# EAGLE board SparkFun LoRaSerial 915MHz - 1W (EAGLE 9.6.2)
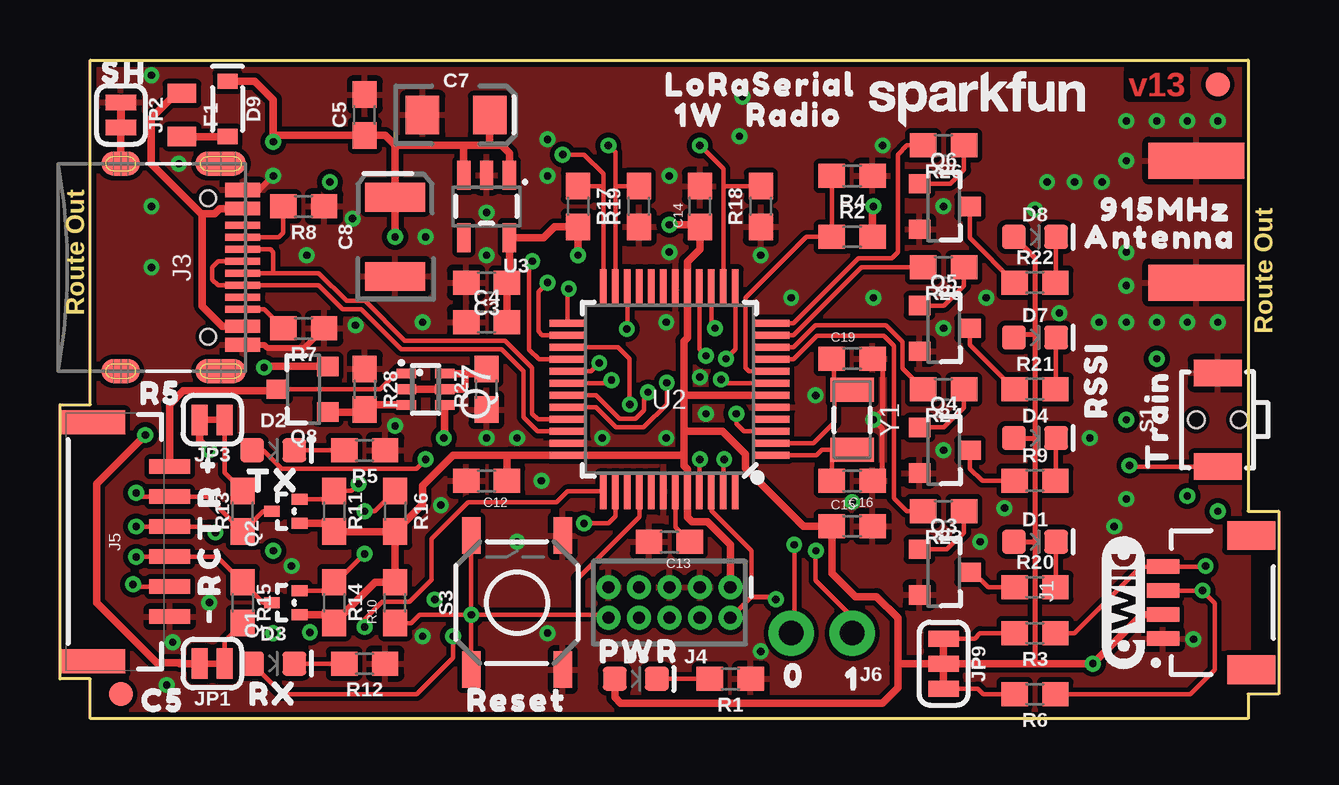
[diagram p0: board, top side]
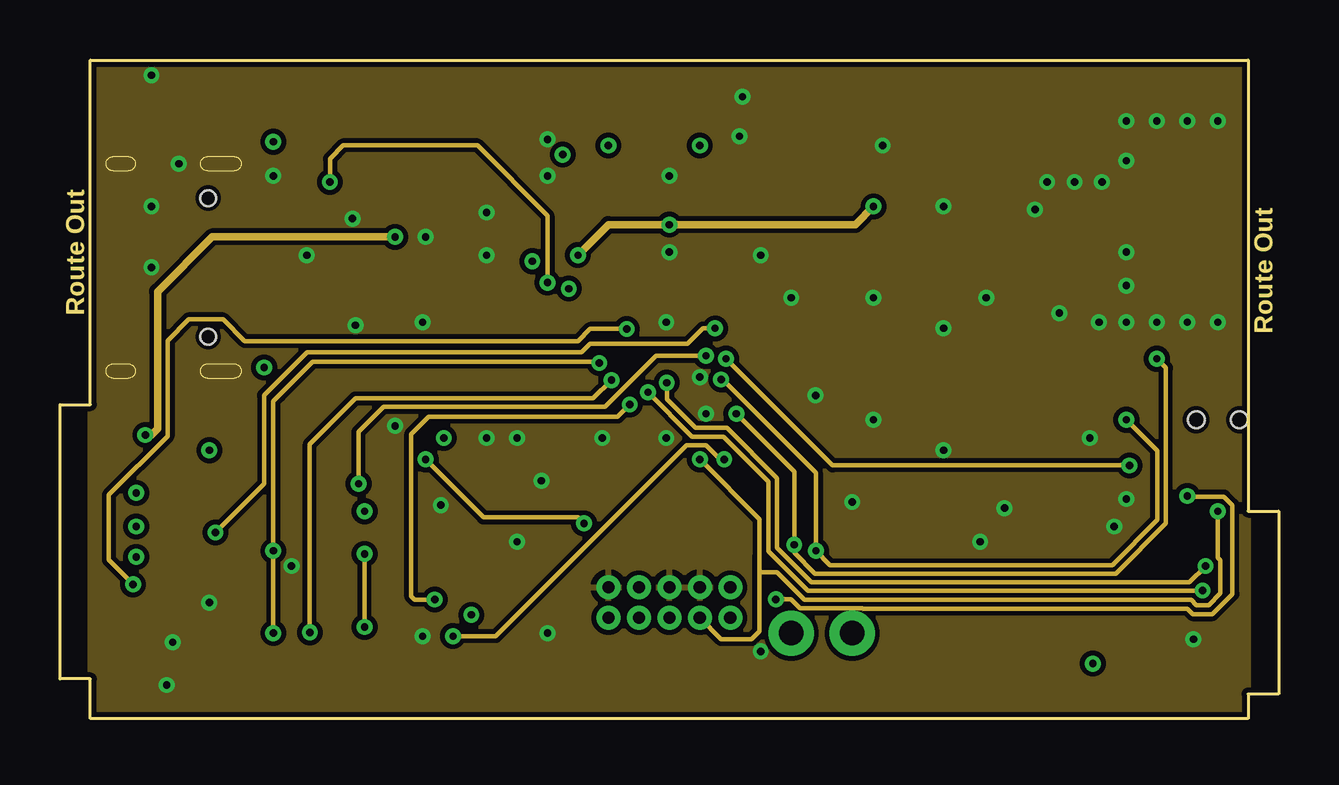
[diagram p1: board, inner layer Digital]
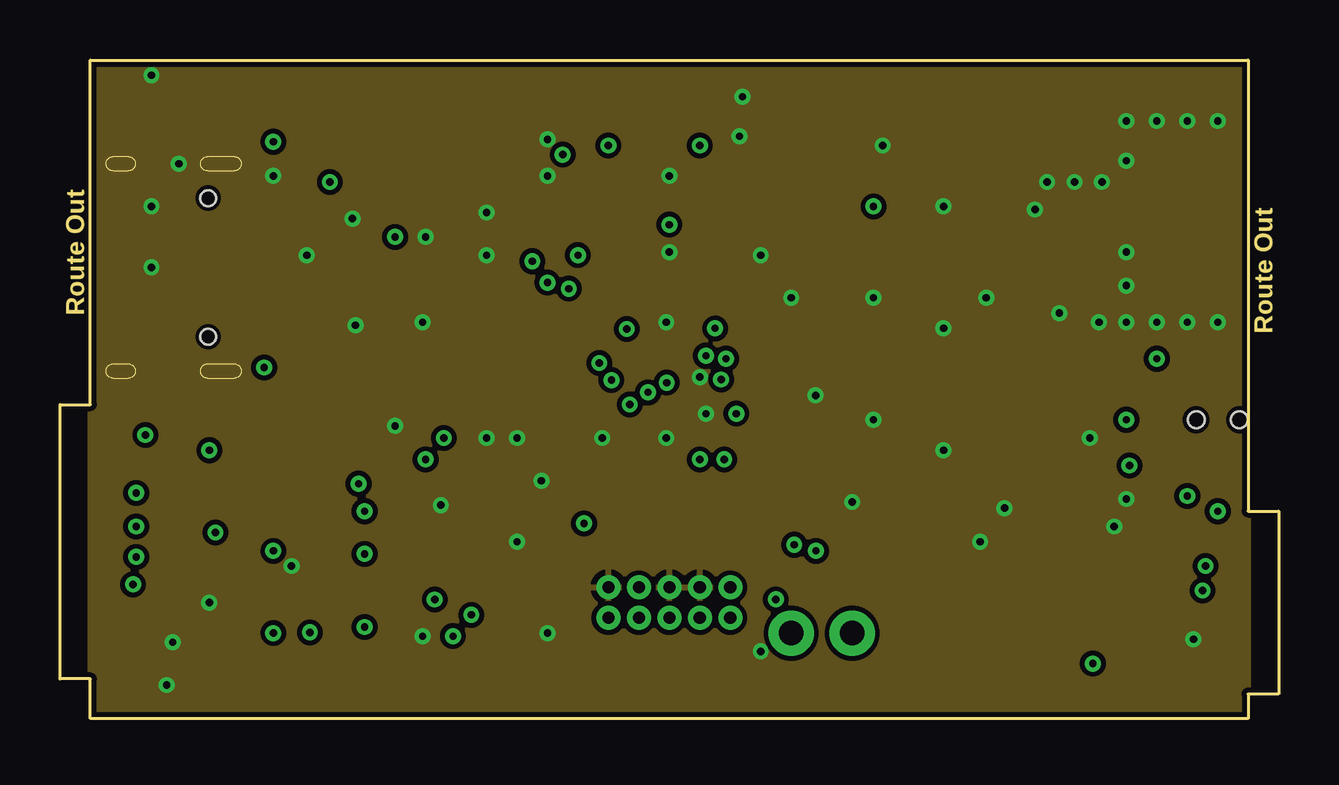
[diagram p2: board, inner layer GND]
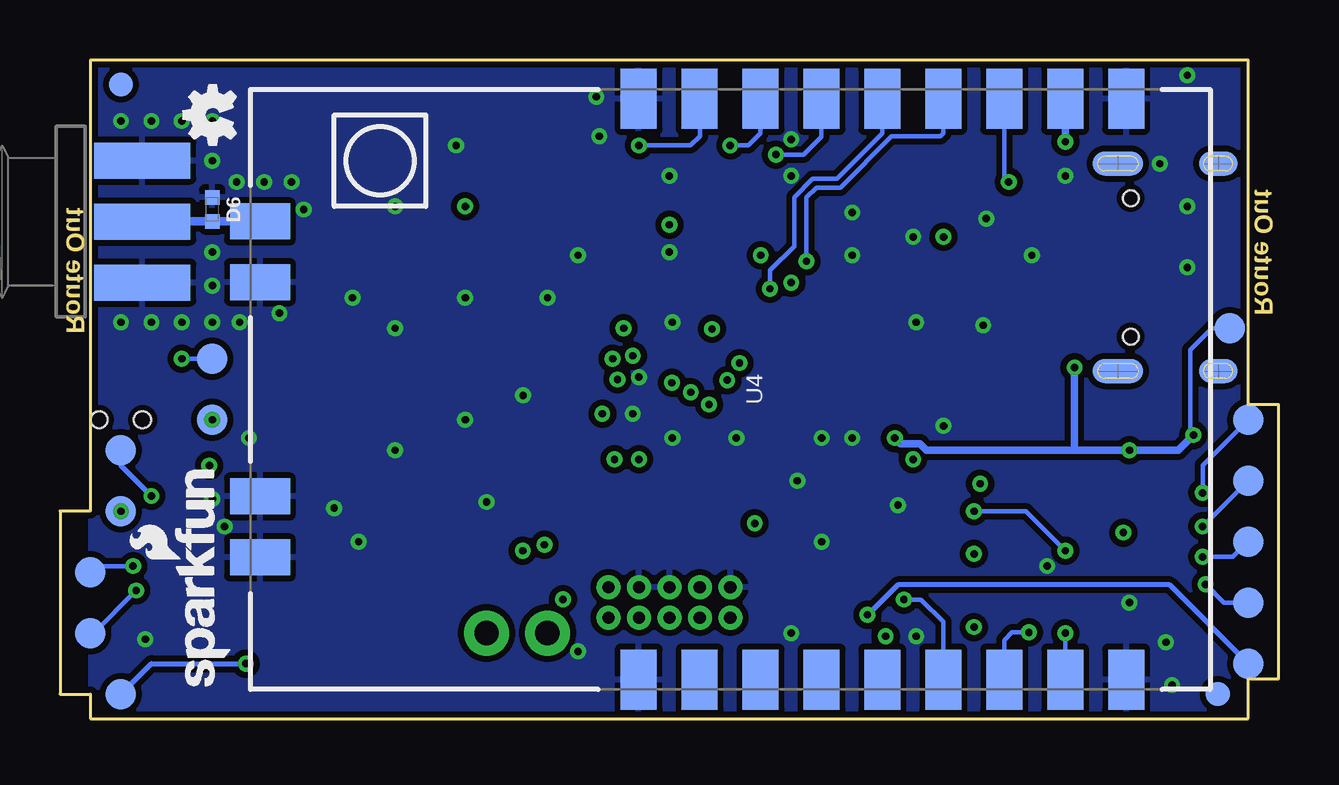
[diagram p3: board, bottom side, seen from below]

Size 50.8 x 27.44 mm. Coordinates in mm from the lower left corner, seen from the top.
Outline: 1.27,0 1.27,1.66 0,1.66 0,13.09 1.27,13.09 1.27,27.44 49.53,27.44 49.53,8.64 50.8,8.64 50.8,1.02 49.53,1.02 49.53,0 1.27,0
Copper layers (1+2*15+16): Top 0.035559375mm / dielectric 0.47751875mm / Digital 0.035559375mm / dielectric 0.47751875mm / GND 0.035559375mm / dielectric 0.47751875mm / Bottom 0.035559375mm
Design rules "SparkFun-4-Layer-General-JLCPCB": minimum track width 7mil, minimum drill 12mil, track to track 7mil, track to pad 7mil, pad to pad 7mil, via to via 7mil, smd to smd 7mil, copper to edge 7mil, drill to drill 7mil, minimum pad ring 7mil, minimum via ring 7mil, stop-mask expansion 3mil, vias tented up to drill 25mil, thermal gap 10mil

## Footprints (pad centres in the part's own frame; a part is rotated, then mirrored left to right if it is on the bottom)
0603 = smd 1.1 x 1: 1 -0.85,0; 2 0.85,0
EIA3216 = smd 1.4 x 1.6: + 1.4,0; - -1.4,0
EIA3528 = smd 1.2 x 2.5: A 1.65,0; C -1.65,0
LED-0603 = smd 1 x 1: A -0.877,0; C 0.877,0
0402-TIGHT = smd 0.6 x 0.6: 1 -0.5,0; 2 0.5,0
SOD-323 = smd 0.63 x 0.83: A 1.15,0; C -1.15,0
RP-SMA-EDGE = smd 1.5 x 4: GND@0 -2.54,0; GND@1 2.54,0; SIG 0,0 | smd 1.5 x 4 bottom: GND@2 -2.54,0; GND@3 2.54,0
0805 = smd 0.8 x 1.2: 1 -0.9,0; 2 0.9,0
FIDUCIAL-1X2 = smd 1 x 1: 1 0,0
JST04_1MM_RA = smd 0.6 x 1.35: 1 -1.5,0; 2 -0.5,0; 3 0.5,0; 4 1.5,0 | smd 1.2 x 2: NC1 2.8,-3.675; NC2 -2.8,-3.675
USB-C-16P = smd 0.3 x 1.45: A5 -1.25,0; A6 -0.25,0; A7 0.25,0; A8 1.25,0; B5 1.75,0; B6 0.75,0; B7 -0.75,0; B8 -1.75,0 | smd 0.6 x 1.45: GND -3.225,0; GND2 3.225,0 | smd 1 x 2.1: SHLD1 -4.32,-0.915; SHLD2 4.32,-0.915 | smd 1 x 2.1 bottom: SHLD3 -4.32,-0.915; SHLD4 4.32,-0.915 | smd 1 x 1.6: SHLD5 -4.32,-5.095; SHLD8 4.32,-5.095 | smd 1 x 1.6 bottom: SHLD6 -4.32,-5.095; SHLD7 4.32,-5.095 | smd 0.55 x 1.45: VBUS1 -2.45,0; VBUS2 2.45,0 | hole 0.65: -2.89,-1.445; 2.89,-1.445
2X5-PTH-1.27MM-NO_SILK = drill 0.508 pad 1: 1 -2.54,-0.635; 2 -2.54,0.635; 3 -1.27,-0.635; 4 -1.27,0.635; 5 0,-0.635; 6 0,0.635; 7 1.27,-0.635; 8 1.27,0.635; 9 2.54,-0.635; 10 2.54,0.635
JST-6-SMD-1.25MM-LOCKING = smd 0.6 x 1.7: 1 -3.125,3.3; 2 -1.875,3.3; 3 -0.625,3.3; 4 0.625,3.3; 5 1.875,3.3; 6 3.125,3.3 | smd 1 x 2.7: NC1 4.975,0.1; NC2 -4.975,0.1
1X02_NO_SILK = drill 1.016 pad 1.88: 1 0,0; 2 2.54,0
SMT-JUMPER_2_NC_TRACE_SILK = smd 0.66 x 1.27: 1 -0.521,0; 2 0.521,0
SMT-JUMPER_3_2-NC_TRACE_SILK = smd 0.66 x 1.27: 1 -1.041,0; 2 0,0; 3 1.041,0
SOT-416FL = smd 0.46 x 0.65: 1 -0.5,-1.1; 2 0.5,-1.1; 3 0,0.05
SOT23-3 = smd 0.8 x 0.9: 1 -0.95,-1; 2 0.95,-1; 3 0,1.1
SOT363_PHILIPS = smd 0.4 x 0.8: 1 -0.65,-0.8; 2 0,-0.8; 3 0.65,-0.8; 4 0.65,0.8; 5 0,0.8; 6 -0.65,0.8
TACTILE_SWITCH_SMD_RIGHT_ANGLE = smd 1.1 x 2: 1 -1.95,0; 2 1.95,0 | hole 0.7: 0,0.9; 0,-0.9
TACTILE_SWITCH_SMD_5.2MM = smd 1.524 x 0.762: 1 -2.794,1.905; 2 2.794,1.905; 3 -2.794,-1.905; 4 2.794,-1.905
PAD.03X.05 = smd 1.27 x 1.27: 1 0,0
TQFP-48 = smd 1.5 x 0.28: 1 -4.25,2.75; 2 -4.25,2.25; 3 -4.25,1.75; 4 -4.25,1.25; 5 -4.25,0.75; 6 -4.25,0.25; 7 -4.25,-0.25; 8 -4.25,-0.75; 9 -4.25,-1.25; 10 -4.25,-1.75; 11 -4.25,-2.25; 12 -4.25,-2.75; 25 4.25,-2.75; 26 4.25,-2.25; 27 4.25,-1.75; 28 4.25,-1.25; 29 4.25,-0.75; 30 4.25,-0.25; 31 4.25,0.25; 32 4.25,0.75; 33 4.25,1.25; 34 4.25,1.75; 35 4.25,2.25; 36 4.25,2.75 | smd 0.28 x 1.5: 13 -2.75,-4.25; 14 -2.25,-4.25; 15 -1.75,-4.25; 16 -1.25,-4.25; 17 -0.75,-4.25; 18 -0.25,-4.25; 19 0.25,-4.25; 20 0.75,-4.25; 21 1.25,-4.25; 22 1.75,-4.25; 23 2.25,-4.25; 24 2.75,-4.25; 37 2.75,4.25; 38 2.25,4.25; 39 1.75,4.25; 40 1.25,4.25; 41 0.75,4.25; 42 0.25,4.25; 43 -0.25,4.25; 44 -0.75,4.25; 45 -1.25,4.25; 46 -1.75,4.25; 47 -2.25,4.25; 48 -2.75,4.25
SOT23-5 = smd 0.55 x 1.2: 1 -0.95,-1.3; 2 0,-1.3; 3 0.95,-1.3; 4 0.95,1.3; 5 -0.95,1.3
E19-915M30S = smd 2.5 x 1.5: 1 12.1,-3.82; 2 12.1,-1.28; 3 12.1,1.26; 4 12.1,3.8; 5 12.1,6.34; 6 12.1,8.88; 7 12.1,11.42; 8 12.1,13.96; 9 12.1,16.5; 10 -12.1,16.5; 11 -12.1,13.96; 12 -12.1,11.42; 13 -12.1,8.88; 14 -12.1,6.34; 15 -12.1,3.8; 16 -12.1,1.26; 17 -12.1,-1.28; 18 -12.1,-3.82 | smd 1.5 x 2.5: 19 -7,-19.6; 20 -4.46,-19.6; 21 4.46,-19.6; 22 7,-19.6
CRYSTAL-SMD-3.2X1.5MM = smd 1 x 1.8: P$1 -1.25,0; P$2 1.25,0

## Placement (x,y rotation side)
C3  1.0uF  [0603]  17.78,18.16 180 top
C4  0.1uF  [0603]  17.78,16.51 0 top
C5  1.0uF  [0603]  12.7,25.15 90 top
C7  10uF  [EIA3216]  16.51,25.15 0 top
C8  47uF  [EIA3528]  13.97,20.07 90 top
C12  0.1uF  [0603]  17.78,9.91 180 top
C13  0.1uF  [0603]  25.4,7.37 180 top
C14  0.1uF  [0603]  26.67,21.34 90 top
C15  0.1uF  [0603]  33.02,8.01 0 top
C16  15pF  [0603]  33.02,9.91 180 top
C19  15pF  [0603]  33.02,14.99 0 top
D1  GREEN  [LED-0603]  40.64,7.37 0 top
D2  BLUE  [LED-0603]  8.89,11.18 0 top
D3  Yellow  [LED-0603]  8.89,2.29 0 top
D4  GREEN  [LED-0603]  40.64,11.69 0 top
D5  RED  [LED-0603]  24,1.66 0 top
D6  PESD0402  [0402-TIGHT]  44.45,21.21 270 bottom
D7  GREEN  [LED-0603]  40.64,15.88 0 top
D8  GREEN  [LED-0603]  40.64,20.07 0 top
D9  3A/10V/280mV  [SOD-323]  6.99,25.4 270 top
E2  RP-SMA  [RP-SMA-EDGE]  47.37,20.7 90 bottom
F1  6V 0.5A  [0805]  5.08,25.15 270 top
FID1  FIDUCIAL1X2  [FIDUCIAL-1X2]  2.54,1.02 0 bottom
FID2  FIDUCIAL1X2  [FIDUCIAL-1X2]  48.26,26.42 0 bottom
FID3  FIDUCIAL1X2  [FIDUCIAL-1X2]  48.26,26.42 0 top
FID4  FIDUCIAL1X2  [FIDUCIAL-1X2]  2.54,1.02 0 top
FRAME3  FRAME-LEDGER  [CREATIVE_COMMONS]  91.44,-9.14 0 top  (outside the outline)
J1  QWIIC_RIGHT_ANGLE  [JST04_1MM_RA]  45.97,4.83 90 top
J3  USB C  [USB-C-16P]  7.62,18.8 270 top
J4  JTAG  [2X5-PTH-1.27MM-NO_SILK]  25.4,4.83 180 top
J5  [JST-6-SMD-1.25MM-LOCKING]  1.27,7.37 270 top
J6  [1X02_NO_SILK]  33.02,3.56 180 top
JP1  JUMPER-SMT_2_NC_TRACE_SILK  [SMT-JUMPER_2_NC_TRACE_SILK]  6.35,2.29 180 top
JP2  [SMT-JUMPER_2_NC_TRACE_SILK]  2.54,25.15 270 top
JP3  JUMPER-SMT_2_NC_TRACE_SILK  [SMT-JUMPER_2_NC_TRACE_SILK]  6.35,12.45 180 top
JP9  JUMPER-SMT_3_2-NC_TRACE_SILK  [SMT-JUMPER_3_2-NC_TRACE_SILK]  36.83,2.29 270 top
LOGO1  SPECIAL_INSTRUCTIONS-ORDERING  [ORDERING_INSTRUCTIONS]  73.66,50.55 0 top  (outside the outline)
LOGO2  SFE_LOGO_NAME_FLAME9_MM  [SFE_LOGO_NAME_FLAME_9MM]  44.96,5.85 90 bottom
LOGO3  QWIIC_LOGO_CONNECTOR  [QWIIC_5.5MM]  44.32,4.83 90 top
LOGO4  OSHW-LOGOMINI  [OSHW-LOGO-MINI]  44.45,25.15 90 bottom
LOGO5  SFE_LOGO_NAME9_MM  [SFE_LOGO_NAME_9MM]  38.23,25.91 0 top
Q1  20V/0.2A/8MHz/1.2Ω/1Vth  [SOT-416FL]  8.89,4.83 90 top
Q2  20V/0.2A/8MHz/1.2Ω/1Vth  [SOT-416FL]  8.89,8.64 90 top
Q3  600mA/40V  [SOT23-3]  36.83,6.1 270 top
Q4  600mA/40V  [SOT23-3]  36.83,11.18 270 top
Q5  600mA/40V  [SOT23-3]  36.83,16.26 270 top
Q6  600mA/40V  [SOT23-3]  36.83,21.34 270 top
Q7  [SOT363_PHILIPS]  15.24,13.72 270 top
Q8  20V/4.2A/52mΩ/1.4W  [SOT23-3]  10.16,13.72 90 top
R1  1k  [0603]  27.94,1.66 180 top
R2  10k  [0603]  33.02,20.07 0 top
R3  2.2k  [0603]  40.64,3.56 180 top
R4  10k  [0603]  33.02,22.61 180 top
R5  0  [0603]  12.7,11.18 180 top
R6  2.2k  [0603]  40.64,1.02 180 top
R7  5.1k  [0603]  10.16,16.26 180 top
R8  5.1k  [0603]  10.16,21.34 180 top
R9  22Ω  [0603]  40.64,9.91 0 top
R10  10k  [0603]  13.97,4.83 90 top
R11  2.2k  [0603]  11.43,8.64 270 top
R12  330  [0603]  12.7,2.29 180 top
R13  2.2k  [0603]  7.62,8.64 90 top
R14  2.2k  [0603]  11.43,4.83 270 top
R15  2.2k  [0603]  7.62,4.83 270 top
R16  100k  [0603]  13.97,8.64 270 top
R17  100k  [0603]  21.59,21.34 270 top
R18  100k  [0603]  29.21,21.34 90 top
R19  100k  [0603]  24.13,21.34 90 top
R20  22Ω  [0603]  40.64,5.46 0 top
R21  22Ω  [0603]  40.64,13.72 0 top
R22  22Ω  [0603]  40.64,18.16 0 top
R23  1k  [0603]  36.83,8.64 180 top
R24  1k  [0603]  36.83,13.72 180 top
R25  1k  [0603]  36.83,18.8 180 top
R26  1k  [0603]  36.83,23.88 180 top
R27  100k  [0603]  17.78,13.72 90 top
R28  1M  [0603]  12.7,13.72 270 top
S1  Train  [TACTILE_SWITCH_SMD_RIGHT_ANGLE]  48.26,12.45 90 top
S3  Reset  [TACTILE_SWITCH_SMD_5.2MM]  19.05,4.83 90 top
TP1  [PAD.03X.05]  48.26,1.02 0 bottom
TP2  [PAD.03X.05]  2.03,16.26 0 bottom
TP3  [PAD.03X.05]  48.26,11.18 0 bottom
TP4  [PAD.03X.05]  48.26,8.64 0 bottom
TP5  [PAD.03X.05]  1.27,2.29 0 bottom
TP6  [PAD.03X.05]  1.27,7.37 0 bottom
TP7  [PAD.03X.05]  1.27,12.45 0 bottom
TP8  [PAD.03X.05]  1.27,9.91 0 bottom
TP9  [PAD.03X.05]  1.27,4.83 0 bottom
TP10  [PAD.03X.05]  49.53,3.56 0 bottom
TP11  [PAD.03X.05]  49.53,6.1 0 bottom
TP12  [PAD.03X.05]  44.45,14.99 0 bottom
TP13  [PAD.03X.05]  44.45,12.45 0 bottom
U2  ATSAMD21G-A  [TQFP-48]  25.4,13.72 180 top
U3  3.3V/150mA  [SOT23-5]  17.78,21.34 180 top
U4  E19-915M30S  [E19-915M30S]  22.86,13.72 270 bottom
U$1  [1W1]  26.67,25.15 0 top
U$2  [RESET0]  19.05,0.77 0 top
U$3  [915MHZ0]  46.1,21.21 0 top
U$4  [TRAIN0]  45.72,12.45 90 top
U$5  [RADIO2]  30.61,25.15 0 top
U$6  [01]  30.61,1.78 0 top
U$7  [PWR0]  24.13,2.8 0 top
U$9  [ANTENNA1]  45.85,20.07 0 top
U$10  [RX1]  8.89,1.02 0 top
U$11  [TX0]  8.89,9.91 0 top
U$12  [#0]  6.22,10.54 0 top
U$13  [#1]  6.22,4.32 90 top
U$14  [R3]  6.22,5.59 90 top
U$15  [T2]  6.22,8.01 90 top
U$16  [C0]  6.22,6.74 90 top
U$17  [R1]  6.22,9.28 90 top
U$18  [LORASERIAL0]  29.21,26.42 0 top
U$19  [C50]  4.3,0.75 0 top
U$20  [R50]  4.2,13.55 0 top
U$21  [RSSI0]  43.18,14.1 90 top
U$22  [10]  33.02,1.66 0 top
U$23  [SH0]  2.67,26.93 0 top
Y1  32.768kHz  [CRYSTAL-SMD-3.2X1.5MM]  33.02,12.45 270 top

## Library data of the parts
C3 C5 = SparkFun-Capacitors; PROD_ID: CAP-13930
C4 = SparkFun-Capacitors; PROD_ID: CAP-08604
C7 = SparkFun-Capacitors; PROD_ID: CAP-00811
C8 = SparkFun-Capacitors; PROD_ID: CAP-08310
C12-C15 = SparkFun-Capacitors; PROD_ID: CAP-00810
C16 C19 = SparkFun-Capacitors; PROD_ID: CAP-07881
D1 D4 D7 D8 = SparkFun-LED; PROD_ID: DIO-00821
D2 = SparkFun-LED; PROD_ID: DIO-08575
D3 = SparkFun-LED; PROD_ID: DIO-09003
D5 = SparkFun-LED; PROD_ID: DIO-00819
D6 = SparkFun-DiscreteSemi; PROD_ID: DIO-15359
D9 = SparkFun-DiscreteSemi; PROD_ID: DIO-14072
E2 = SparkFun-RF; PROD_ID: CONN-00827
F1 = SparkFun-Fuses; PROD_ID: RES-13945
FID1-FID4 FRAME3 LOGO1-LOGO5 = SparkFun-Aesthetics
J1 = SparkFun-Connectors; PROD_ID: CONN-13694
J3 = USB-C
J4 J6 TP1-TP13 = SparkFun-Connectors
J5 = SparkFun-Connectors; PROD_ID: CONN-16497
JP1-JP3 JP9 = SparkFun-Jumpers
Q1 Q2 = SparkFun-DiscreteSemi; PROD_ID: TRANS-14399
Q3-Q6 = SparkFun-DiscreteSemi; PROD_ID: TRANS-08049
Q7 = SparkFun-DiscreteSemi; PROD_ID: TRANS-14386
Q8 = SparkFun-DiscreteSemi; PROD_ID: TRANS-14388
R1 R23-R26 = SparkFun-Resistors; PROD_ID: RES-07856
R2 R4 R10 = SparkFun-Resistors; PROD_ID: RES-00824
R3 R6 R11 R13-R15 = SparkFun-Resistors; PROD_ID: RES-08272
R5 = SparkFun-Resistors; PROD_ID: RES-08609
R7 R8 = SparkFun-Resistors; PROD_ID: RES-12083
R9 R20-R22 = SparkFun-Resistors; PROD_ID: RES-08698
R12 = SparkFun-Resistors; PROD_ID: RES-00818
R16-R19 R27 = SparkFun-Resistors; PROD_ID: RES-07828
R28 = SparkFun-Resistors; PROD_ID: RES-07868
S1 = SparkFun-Switches; PROD_ID: COMP-12265
S3 = SparkFun-Switches; PROD_ID: SWCH-14139
U2 = samd21-temp; PROD_ID: IC-13064
U3 = SparkFun-IC-Power; PROD_ID: VREG-00822
U4 = SparkFun-RF; PROD_ID: IC-14076
U$1-U$7 U$9-U$23 = output
Y1 = samd21-temp; PROD_ID: XTAL-13062

## Nets
3.3V [power]: C3.1 C4.2 C12.1 C14.1 C15.1 D1.A D4.A D5.A D7.A D8.A J1.2 J4.1 JP9.2 Q1.1 Q2.1 R2.2 R10.2 R11.2 R14.2 R16.2 R17.2 TP1.1 U2.6 U2.17 U2.36 U2.44 U3.5
5V: C5.1 C7.+ C8.A D9.C JP1.2 JP3.2 Q7.4 Q8.2 TP2.1 U3.1 U3.3 U4.11
A0: J6.2 TP12.1 U2.3
A1: J6.1 TP13.1 U2.7
A2/BOARD_ID: R2.1 R4.2 U2.8
A3/RSSI1: R23.2 U2.9
A4/RSSI2: R24.2 U2.10
A5/RX_LED: D3.A U2.47
CC1: J3.A5 R8.2
CC2: J3.B5 R7.2
CTS-I_HV: J5.4 Q1.3 R15.1 TP6.1
D2/LORA_TXEN: R19.2 U2.23 U4.16
D3/LORA_RXEN: R18.2 U2.14 U4.17
D4/TRAIN: S1.1 U2.13
D5/LORA_!CS!: R17.1 U2.24 U4.15
D6/LORA_!RST!: R16.1 U2.29 U4.8
D7/LORA_D0: U2.30 U4.7
D8/RSSI3: R25.2 U2.11
D9/RSSI4: R26.2 U2.12
D10/LORA_D1: U2.27 U4.6
D11/SPI_PICO: U2.25 U4.14
D12/SPI_POCI: U2.28 U4.13
D13/SPI_SCK: U2.26 U4.12
D20/SDA: J1.3 R6.1 TP10.1 U2.31
D21/SCL: J1.4 R3.1 TP11.1 U2.32
D22: U2.21
D23: U2.19
D24: U2.20
D27/USB_HOST_EN: U2.41
D28/USB_D-: J3.A7 J3.B7 U2.33
D29/USB_D+: J3.A6 J3.B6 U2.34
D30/CTS-I_LV: Q1.2 R14.1 U2.37
D31/TX_LED: D2.A U2.38
D38/RTS-O: J5.5 TP9.1 U2.22
D42/AREF: U2.4
GND: C3.2 C4.1 C5.2 C7.- C8.C C12.2 C13.2 C14.2 C15.2 C16.1 C19.2 D6.1 E2.GND@0 E2.GND@1 E2.GND@2 E2.GND@3 J1.1 J3.GND J3.GND2 J4.3 J4.5 J4.9 J5.6 JP2.1 Q3.2 Q4.2 Q5.2 Q6.2 R1.1 R4.1 R5.1 R7.1 R8.1 R12.1 R18.1 R19.1 R27.1 R28.1 S1.2 S3.3 S3.4 U2.5 U2.18 U2.35 U2.42 U3.2 U4.1 U4.9 U4.10 U4.18 U4.20 U4.21 U4.22
LORA_ANT: D6.2 E2.SIG U4.19
N$1: C19.1 U2.2 Y1.P$1
N$2: C16.2 U2.1 Y1.P$2
N$3: D3.C R12.2
N$4: D2.C R5.2
N$5: JP3.1 R13.2
N$6: JP1.1 R15.2
N$7: D5.C R1.2
N$8: D4.C R9.2
N$9: D1.C R20.2
N$10: D7.C R21.2
N$11: D8.C R22.2
N$12: Q3.3 R20.1
N$13: Q3.1 R23.1
N$14: Q4.3 R9.1
N$15: Q4.1 R24.1
N$16: Q5.3 R21.1
N$17: Q5.1 R25.1
N$18: Q6.3 R22.1
N$19: Q6.1 R26.1
N$20: J3.SHLD1 J3.SHLD2 J3.SHLD3 J3.SHLD4 J3.SHLD5 J3.SHLD6 J3.SHLD7 J3.SHLD8 JP2.2
N$21: Q7.3 Q8.1 R28.2
N$22: Q7.2 Q7.5 Q7.6 R27.2
RX-I_HV: J5.2 Q2.3 R13.1 TP7.1
RX-I_LV: Q2.2 R11.1 U2.16
SAMD_!RESET!: J4.10 R10.1 S3.1 S3.2 TP5.1 U2.40
SCL_PU1: JP9.1 R3.2
SDA_PU1: JP9.3 R6.2
SWCLK: J4.4 TP4.1 U2.45
SWDIO: J4.2 TP3.1 U2.46
TX-O: J5.3 TP8.1 U2.15
V_USB: D9.A F1.2
VCC_CABLE: J5.1 Q7.1 Q8.3
VDDCORE: C13.1 U2.43
VUSB [power]: F1.1 J3.VBUS1 J3.VBUS2

## Tracks (layer width: path | path; a pad name or v marks a point on that pad's centre or on a via)
3.3V  (via drill 0.3)
  Top 0.203: D8.A 40.64,19.19 40.64,16.01 | 40.64,16.01 40.64,11.69 | 40.64,11.69 40.64,7.37 | 40.64,7.37 40.64,2.29 | D1.A 40.64,7.37 | D4.A 40.64,11.69 | D7.A 39.89,16.01 40.64,16.01
  Top 0.305: U2.6 26.01,13.47 | 26.01,13.47 26.01,15.73 26.15,15.87 U2.17 26.15,19.04 26.67,19.56 C14.1 26.58,20.58 v25.4,20.58 | C4.2 C3.1 18.73,18.27 U3.5 20.16,20.04 20.61,20.49 R17.2 v21.59,19.31 | R16.2 R10.2 13.13,5.68 R14.2 11.08,4.33 Q1.1 | J4.1 27.94,7.24 26.98,8.2 26.35,8.2 26.15,8.4 U2.44 26.15,10.38 26.01,10.53 26.01,11.05 | 18.67,10.97 U2.36 25.93,10.97 26.01,11.05 | C12.1 18.63,10.93 18.67,10.97 | 26.01,11.05 26.01,11.94 | 26.01,11.94 26.01,13.47 | 26.01,11.94 26.03,11.97 27.62,11.97 28.57,11.02 28.57,10.42 30.99,8.01 C15.1 32.17,6.06 33.15,5.08 34.04,5.08 34.92,4.2 34.92,2.29 | 18.67,10.97 16.39,10.97 15.11,9.7 15.11,8.93 R16.2 | R16.2 R11.2 11.08,8.14 Q2.1 | J1.2 45.09,4.33 v43.05,2.29 40.64,2.29 JP9.2 34.92,2.29 | R2.2 33.87,21.3 v33.91,21.34 | D5.A 23.13,0.88 23.37,0.64 34.29,0.64 34.92,1.27 34.92,2.29
  Digital 0.305: v21.59,19.31 22.86,20.58 v25.4,20.58 33.15,20.58 v33.91,21.34
  Bottom 0.203: TP1.1 46.99,2.29 v43.05,2.29
5V  (via drill 0.3)
  Top 0.305: 13.97,23.88 13.55,24.3 C5.1 8.93,24.3 8.89,24.26 | U3.1 18.73,23.57 18.41,23.88 17.91,23.88 | 13.97,23.88 16.76,23.88 | 16.76,23.88 17.91,23.88 | U3.3 16.83,23.81 16.76,23.88 | JP1.2 5,2.29 4.97,2.31 4.04,2.31 1.52,4.83 1.52,9.78 v3.56,11.81 | C7.+ 17.91,23.88 | JP3.2 5.83,11.57 v6.22,11.18 | Q8.2 8.55,14.67 v8.51,14.63 | Q7.4 16.04,11.73 v16,11.69 | v13.97,20.07 C8.A 13.97,23.88 | D9.C 8.12,26.55 8.89,25.79 8.89,24.26 | 8.89,24.26 v8.89,24.03
  Digital 0.305: v13.97,20.07 6.35,20.07 4.06,17.78 4.06,12.07 3.81,11.81 v3.56,11.81
  Bottom 0.178: v3.56,11.81 3.68,11.94 3.68,15.37 2.79,16.26 TP2.1
  Bottom 0.305: v8.89,24.03 U4.11 | v3.56,11.81 4.19,11.18 v6.22,11.18 8.51,11.18 | 8.51,11.18 14.69,11.18 14.97,11.46 15.77,11.46 v16,11.69 | v8.51,14.63 8.51,11.18
A0  (via drill 0.3)
  Top 0.178: v28.19,12.7 28.19,12.28 28.5,11.97 U2.3 | v30.61,7.24 30.61,3.69 J6.2
  Digital 0.178: v28.19,12.7 30.61,10.29 v30.61,7.24 30.61,6.9 31.47,6.04 44.01,6.04 46.1,8.13 46.1,14.61 v45.72,14.99
  Bottom 0.178: v45.72,14.99 TP12.1
A1  (via drill 0.3)
  Top 0.178: U2.7 27.72,13.97 v27.56,14.13 | v31.51,6.99 31.5,6.98 31.5,5.76 33.02,4.24 J6.1
  Digital 0.178: v27.56,14.13 27.61,14.13 31.51,10.23 v31.51,6.99 32.1,6.4 43.86,6.4 45.74,8.28 45.74,11.15 TP13.1
  other vias: 44.45,12.45
A2/BOARD_ID
  Top 0.178: U2.8 28.71,14.47 28.57,14.61 28.57,17.53 31.11,20.07 R2.1 R4.2
A3/RSSI1
  Top 0.178: U2.9 30.58,14.97 31.55,15.95 34.34,15.95 34.76,15.53 34.76,9.19 35.31,8.64 R23.2
A4/RSSI2
  Top 0.178: U2.10 30.57,15.47 31.49,16.39 34.42,16.39 35.11,15.69 35.11,14.59 R24.2
A5/RX_LED  (via drill 0.3)
  Top 0.178: U2.47 27.65,10.76 v27.69,10.8 | v16.38,3.43 16.38,2.54 14.86,1.02 9.28,1.02 D3.A
  Digital 0.178: v27.69,10.8 27.51,10.8 26.92,11.4 26.12,11.4 18.16,3.43 v16.38,3.43
CC1
  Top 0.178: J3.A5 9.12,20.05 9.31,20.24 R8.2
CC2
  Top 0.178: J3.B5 8.52,17.05 R7.2
CTS-I_HV  (via drill 0.3)
  Top 0.178: Q1.3 8.47,4.83 R15.1 6.55,6.75 J5.4 3.19,6.75 v3.17,6.74
  Bottom 0.178: v3.17,6.74 1.91,6.74 TP6.1
D2/LORA_TXEN  (via drill 0.3)
  Top 0.178: U2.23 23.15,22.23 | 23.15,22.23 23.15,23.59 v22.86,23.88 | R19.2 23.19,22.19 23.15,22.23
  Bottom 0.178: v22.86,23.88 22.1,23.88 21.6,24.38 U4.16
D3/LORA_RXEN  (via drill 0.3)
  Top 0.178: U2.14 27.65,22.23 | 27.65,22.23 27.65,22.9 v26.67,23.88 | R18.2 27.69,22.19 27.65,22.23
  Bottom 0.178: v26.67,23.88 24.51,23.88 24.13,24.26 U4.17
D4/TRAIN  (via drill 0.3)
  Top 0.178: U2.13 28.15,15.38 v27.76,14.99 | S1.1 44.62,10.5 v44.58,10.54
  Digital 0.178: v44.58,10.54 32.21,10.54 v27.76,14.99
D5/LORA_!CS!  (via drill 0.3)
  Top 0.178: U2.24 22.65,22.23 | 22.65,22.23 22.65,22.69 21.84,23.5 v20.95,23.5 | R17.1 22.61,22.19 22.65,22.23
  Bottom 0.178: v20.95,23.5 19.81,23.5 19.06,24.25 U4.15
D6/LORA_!RST!  (via drill 0.3)
  Top 0.178: U2.29 22.14,14.47 v22.48,14.81 | R16.1 13.12,8.64 v12.7,8.64
  Digital 0.178: v22.48,14.81 22.43,14.86 10.54,14.86 9.14,13.47 8.89,13.21 v8.89,6.99 v8.89,3.56
  Bottom 0.178: U4.8 v8.9,3.55 v8.89,3.56 | v12.7,8.64 10.54,8.64 v8.89,6.99
D7/LORA_D0  (via drill 0.3)
  Top 0.178: U2.30 22.86,13.97 v22.99,14.1
  Digital 0.178: v22.99,14.1 22.23,13.34 12.32,13.34 10.41,11.43 v10.41,3.59
  Bottom 0.178: U4.7 11.44,3.27 11.12,3.59 v10.41,3.59
D8/RSSI3
  Top 0.178: U2.11 30.57,15.97 33.4,18.8 R25.2
D9/RSSI4
  Top 0.178: U2.12 30.57,16.47 33.28,19.18 34.67,19.18 34.92,19.43 34.92,23.5 35.31,23.88 R26.2
D10/LORA_D1  (via drill 0.3)
  Top 0.178: v23.75,13.09 23.75,14.99 23.27,15.47 U2.27
  Digital 0.178: v23.75,13.09 23.24,12.58 15.37,12.58 14.64,11.85 14.64,5.09 14.78,4.96 v15.62,4.96
  Bottom 0.178: v15.62,4.96 14.9,4.96 13.98,4.03 U4.6
D11/SPI_PICO  (via drill 0.3)
  Top 0.178: U2.25 21.15,17.85 v21.21,17.91
  Bottom 0.178: U4.14 16.52,24.38 18.41,22.48 19.43,22.48 20.19,21.72 20.19,19.69 21.21,18.67 v21.21,17.91
D12/SPI_POCI  (via drill 0.3)
  Top 0.178: U2.28 19.96,14.97 19.56,15.37 19.56,18.93 v19.68,19.05
  Bottom 0.178: v19.68,19.05 19.68,21.72 19.28,22.13 18.27,22.13 16.13,24.26 14.1,24.26 13.97,24.39 U4.13
D13/SPI_SCK  (via drill 0.3)
  Top 0.178: U2.26 20.1,15.97 19.94,16.13 19.94,17.78 v20.32,18.16
  Digital 0.178: v20.32,18.16 20.32,20.96 17.4,23.88 11.81,23.88 11.25,23.32 v11.25,22.36
  Bottom 0.178: U4.12 11.44,22.54 v11.25,22.36
D20/SDA  (via drill 0.3)
  Top 0.178: U2.31 22.35,13.47 23.33,12.49 24,12.49 24.35,12.84 24.35,13.3 24.51,13.47 v24.51,13.59 | v47.62,5.34 v47.62,5.33 | v47.62,5.33 J1.3 | R6.1 47.12,1.02 48.13,2.04 48.13,4.81 v47.62,5.33
  Digital 0.178: v47.62,5.34 47.61,5.32 31.18,5.32 29.53,6.97 29.53,9.87 27.65,11.75 26.35,11.75 v24.51,13.59
  Bottom 0.178: v47.62,5.34 49.4,3.56 TP10.1
D21/SCL  (via drill 0.3)
  Top 0.178: U2.32 22.34,12.97 23.18,12.13 24.32,12.13 25.29,13.11 v25.29,13.99 | v47.75,6.35 47.73,6.33 J1.4 45.06,6.33 42.29,3.56 R3.1
  Digital 0.178: v25.29,13.99 25.29,13.31 26.5,12.11 27.8,12.11 29.88,10.02 29.88,7.12 31.32,5.68 34,5.68 34.29,5.68 47.08,5.68 v47.75,6.35
  Bottom 0.178: v47.75,6.35 49.28,6.35 TP11.1
D28/USB_D-
  Top 0.178: J3.A7 8.89,18.55 | J3.B7 8.78,19.55 8.89,19.43 8.89,18.55 | 8.89,18.55 10.79,18.55 11.94,17.4 12.71,17.4 14.37,15.75 18.55,15.75 19.68,14.61 19.68,12.7 19.92,12.47 U2.33
D29/USB_D+
  Top 0.178: J3.A6 6.6,19.05 6.35,18.8 6.35,18.29 6.59,18.05 J3.B6 10.79,18.05 11.79,17.05 12.56,17.05 14.22,15.39 18.4,15.39 19.33,14.46 19.33,12.56 19.92,11.97 U2.34
D30/CTS-I_LV  (via drill 0.3)
  Top 0.178: Q1.2 11.08,5.33 R14.1 11.52,5.68 v12.7,6.86 | U2.37 21.15,9.47 20.7,9.02 17.02,9.02 15.5,7.5 15.5,5.78 14.58,4.86 13.43,4.86 12.7,4.14 v12.7,3.81
  Digital 0.178: v12.7,3.81 v12.7,6.86
D31/TX_LED  (via drill 0.3)
  Top 0.178: v21.84,8.13 22.86,8.13 23.15,8.42 U2.38 | D2.A 8.48,11.18 9.24,10.41 14.85,10.41 v15.24,10.8
  Digital 0.178: v15.24,10.8 17.65,8.39 21.59,8.39 v21.84,8.13
D38/RTS-O  (via drill 0.3)
  Top 0.178: U2.22 23.65,16.26 v23.62,16.23 | J5.5 3.15,5.5 v3.05,5.59
  Digital 0.178: v23.62,16.23 22.1,16.23 21.59,15.73 7.7,15.73 6.8,16.63 5.36,16.63 4.48,15.75 4.48,11.77 2.03,9.32 2.03,6.61 v3.05,5.59
  Bottom 0.178: v3.05,5.59 2.29,4.83 TP9.1
GND  (via drill 0.3)
  Top 0.203: C19.2 34.29,14.57 34.29,12.83 v33.91,12.45 34.29,12.07 34.29,10.33 C16.1
  Top 0.254: J3.GND2 8.51,15.57 8.63,15.46 10.21,15.46 R7.1 | J3.GND 8.3,22.02 v8.89,22.61
  other vias: 17.78,19.31 13.97,12.2 17.78,21.09 15.24,20.07 9.65,6.35 20.32,24.13 20.32,22.61 25.4,22.61 29.21,19.31 25.4,19.43 25.27,16.51 25.27,11.69 31.5,13.47 38.61,17.53 36.83,11.18 20.07,9.91 12.19,20.83 4.7,3.18 4.45,1.4 29.21,2.8 39.37,8.77 42.93,11.69 43.94,8.01 46.99,16.51 44.45,18.04 43.31,16.51 41.66,16.89 44.45,19.43 44.45,23.25 46.99,24.9 42.29,22.36 40.64,21.21 28.45,25.91 28.32,24.26 3.81,26.8 4.95,23.12 47.24,3.31 22.61,11.69 38.35,7.37 19.05,7.37 44.45,9.15 17.78,11.69 15.11,3.43 36.83,16.26 36.83,21.34 33.02,9.02 20.32,3.56 44.45,24.9 45.72,24.9 48.26,24.9 44.45,16.51 45.72,16.51 48.26,16.51 43.43,22.36 41.15,22.36 19.05,11.69 12.32,16.39 15.88,8.89 15.11,16.51 10.29,19.31 6.22,4.83 33.91,17.53 26.92,12.7 26.67,14.23 3.81,21.34 3.81,18.8 30.48,17.53 34.29,23.88
  pour Top (isolate 0.203): 1.27,-0.25 1.27,27.69 49.53,27.69 49.53,-0.25
  pour Digital (isolate 0.203): 1.27,-0.25 1.27,27.69 49.53,27.69 49.53,-0.25
  pour GND (isolate 0.203): 1.27,-0.25 1.27,27.69 49.53,27.69 49.53,-0.25
  pour Bottom (isolate 0.254): 1.27,-0.25 1.27,27.69 49.53,27.69 49.53,-0.25
LORA_ANT
  Bottom 0.36: U4.19 D6.2 47.36,20.71
  Bottom 0.739: 47.36,20.71 E2.SIG
N$1
  Top 0.178: U2.2 31.41,11.47 32.28,12.34 32.28,13.7 | C19.1 32.26,14.9 32.26,13.72 32.28,13.7 | 32.28,13.7 Y1.P$1
N$2
  Top 0.178: U2.1 31.54,10.97 31.77,11.2 32.13,11.2 | 32.13,11.2 Y1.P$2 | C16.2 32.17,11.16 32.13,11.2
N$3
  Top 0.178: D3.C R12.2
N$4
  Top 0.178: R5.2 D2.C
N$5
  Top 0.178: JP3.1 6.87,10.24 R13.2
N$6
  Top 0.178: JP1.1 6.87,3.23 R15.2
N$7
  Top 0.178: D5.C R1.2
N$8
  Top 0.178: D4.C 41.52,9.94 R9.2
N$9
  Top 0.178: D1.C 41.52,5.49 R20.2
N$10
  Top 0.178: D7.C 41.52,13.75 R21.2
N$11
  Top 0.178: D8.C 41.52,18.19 R22.2
N$12
  Top 0.178: R20.1 38.69,5.46 38.06,6.1 Q3.3
N$13
  Top 0.178: Q3.1 36.98,7.05 37.68,7.75 R23.1
N$14
  Top 0.178: R9.1 38.44,9.91 37.93,10.42 Q4.3
N$15
  Top 0.178: Q4.1 36.85,12.13 37.68,12.96 R24.1
N$16
  Top 0.178: R21.1 37.93,15.58 Q5.3
N$17
  Top 0.178: Q5.1 36.85,17.21 37.68,18.04 R25.1
N$18
  Top 0.178: R22.1 37.93,20.02 Q6.3
N$19
  Top 0.178: Q6.1 37.11,22.29 37.68,22.86 R26.1
N$20
  Top 0.305: JP2.2 2.54,23.14 J3.SHLD5
N$21
  Top 0.305: Q8.1 12.6,12.77 R28.2 12.9,13.07 Q7.3
N$22
  Top 0.305: Q7.6 16.89,14.37 | 16.89,14.37 17.58,14.37 R27.2 | 16.89,14.37 16.89,13.85 16.76,13.72 Q7.5 Q7.2
RX-I_HV  (via drill 0.3)
  Top 0.178: Q2.3 8.47,8.64 R13.1 6.17,9.24 J5.2 3.33,9.24 v3.17,9.4
  Bottom 0.178: TP7.1 3.17,10.54 v3.17,9.4
RX-I_LV  (via drill 0.3)
  Top 0.178: Q2.2 11.08,9.14 R11.1 12.15,9.49 v12.45,9.78 | v26.92,15.12 26.65,15.39 U2.16
  Digital 0.178: v12.45,9.78 12.45,11.94 13.49,12.98 22.71,12.98 24.85,15.12 v26.92,15.12
SAMD_!RESET!  (via drill 0.3)
  Top 0.178: U2.40 24.15,8.41 21.59,5.85 21.59,4.32 | S3.1 v17.14,4.32 | v17.14,4.32 S3.2 | R10.1 14.64,3.98 14.99,4.32 v17.14,4.32 | J4.10 22.73,4.2 22.61,4.32 21.59,4.32 | 21.59,4.32 v17.14,4.32
  Bottom 0.203: v17.14,4.32 17.12,4.32 15.87,5.57 4.55,5.57 TP5.1
SCL_PU1
  Top 0.178: JP9.1 38.12,3.33 38.35,3.56 R3.2
SDA_PU1
  Top 0.178: JP9.3 38.25,1.25 38.48,1.02 R6.2
SWCLK  (via drill 0.3)
  Top 0.178: U2.45 26.65,10.78 v26.67,10.8
  Digital 0.178: v26.67,10.8 29.16,8.31 29.16,6.82 29.16,6.1 | J4.4 27.56,3.31 28.83,3.31 29.16,3.64 29.16,6.1 | TP4.1 48.26,6.71 48.36,6.61 48.36,5.21 47.88,4.73 47.37,4.73 47.15,4.95 31.03,4.95 29.88,6.1 29.16,6.1
  other vias: 48.26,8.64
SWDIO  (via drill 0.3)
  Top 0.178: U2.46 27.15,8.67 28.83,6.99 28.83,5.08 J4.2
  Top 0.203: 28.83,5.08 29.72,5.08 v29.84,4.96
  Digital 0.178: v46.99,9.28 47.02,9.25 48.51,9.25 48.87,8.89 48.87,5.18 48.03,4.35 47.22,4.35 46.99,4.58 33.46,4.58 33.45,4.59 30.85,4.59 30.47,4.96 v29.84,4.96
  Bottom 0.203: v46.99,9.28 48.26,10.54 TP3.1
TX-O  (via drill 0.3)
  Top 0.178: v27.3,16.26 27.15,16.41 U2.15 | v6.48,7.75 6.23,7.99 J5.3 3.19,7.99 v3.17,8.01
  Digital 0.178: v6.48,7.75 8.51,9.78 8.51,13.47 10.3,15.26 21.73,15.26 22.1,15.62 26.16,15.62 26.8,16.26 v27.3,16.26
  Bottom 0.178: v3.17,8.01 TP8.1
V_USB
  Top 0.305: F1.2 D9.A
VCC_CABLE
  Top 0.178: Q8.3 13.34,13.72 13.98,14.37 Q7.1
  Top 0.305: Q8.3 8.99,13.65 5.14,13.65 4.57,13.08 J5.1
VDDCORE
  Top 0.178: U2.43 25.65,7.97 C13.1
VUSB
  Top 0.305: J3.VBUS1 6.66,21.25 6.45,21.04 5.89,21.04 | 5.89,21.04 3.81,23.12 3.81,25.02 4.25,25.47 4.34,25.56 4.84,26.05 F1.1 | J3.VBUS2 6.77,16.35 5.93,17.19 5.93,21 5.89,21.04

## Text on the board
Top: v13
Milling: Route Out | Route Out
Measures: Dimensions in mm
tDocu: 4-Layer PCB / JLC7628 Impedance Controlled / 1.6mm Thickness / 1oz Copper / HASL RoHS Finish | N. Seidle